# Altium PCB Arduino-Pro-Mini.PcbDoc
Units mm, origin at the board's own origin, x right, y up, seen from the top; angles counter-clockwise.
Board outline 17.78 x 33.02 mm, 2 copper layers (Top, Bottom), stack 1.57 mm thick; 29 components, 33 nets, 108 pads, 29 vias.
Unrouted connection lines stored in the file: 5.
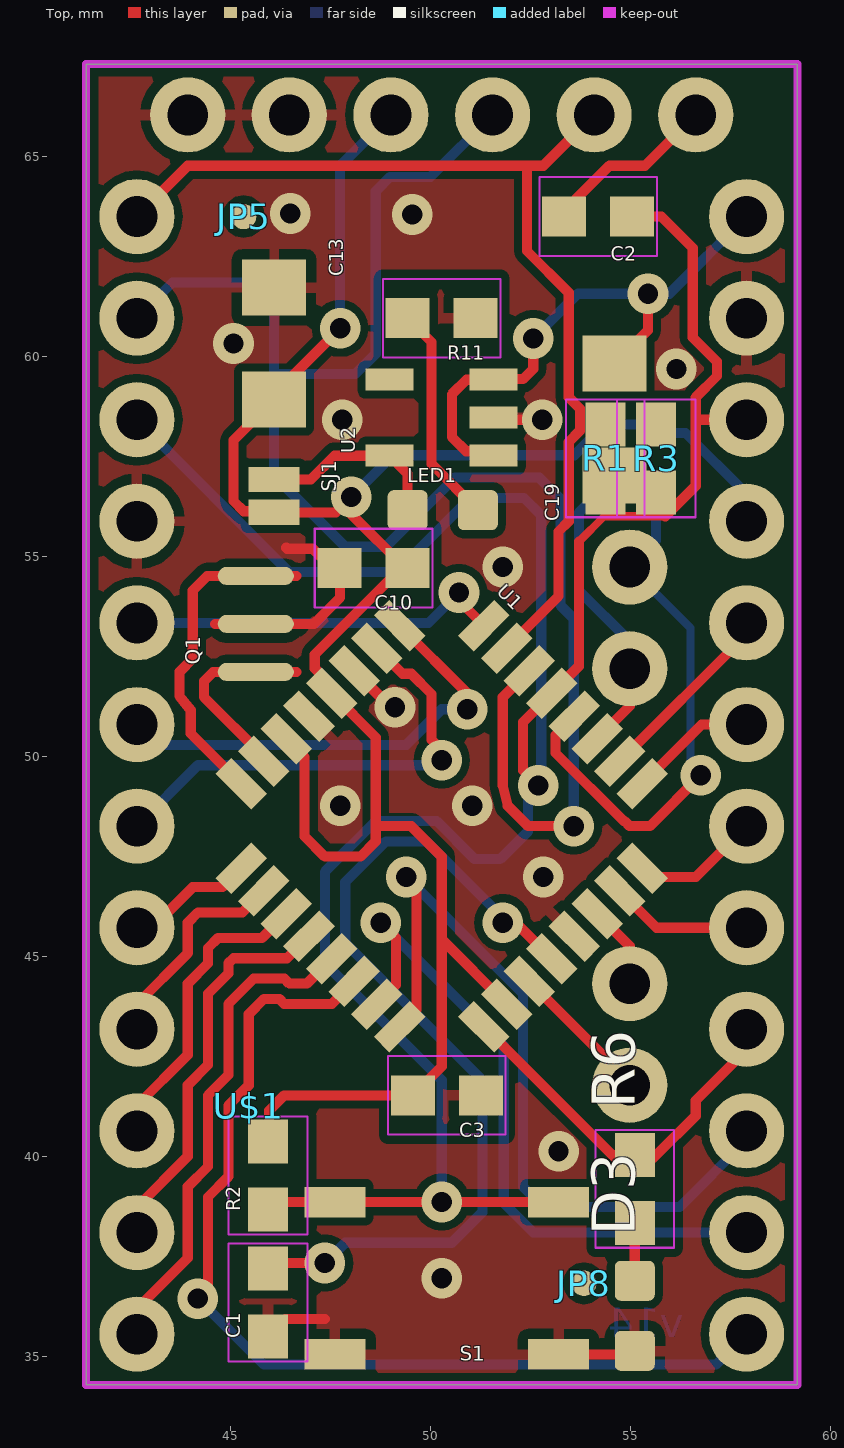
[diagram p0: Top view]
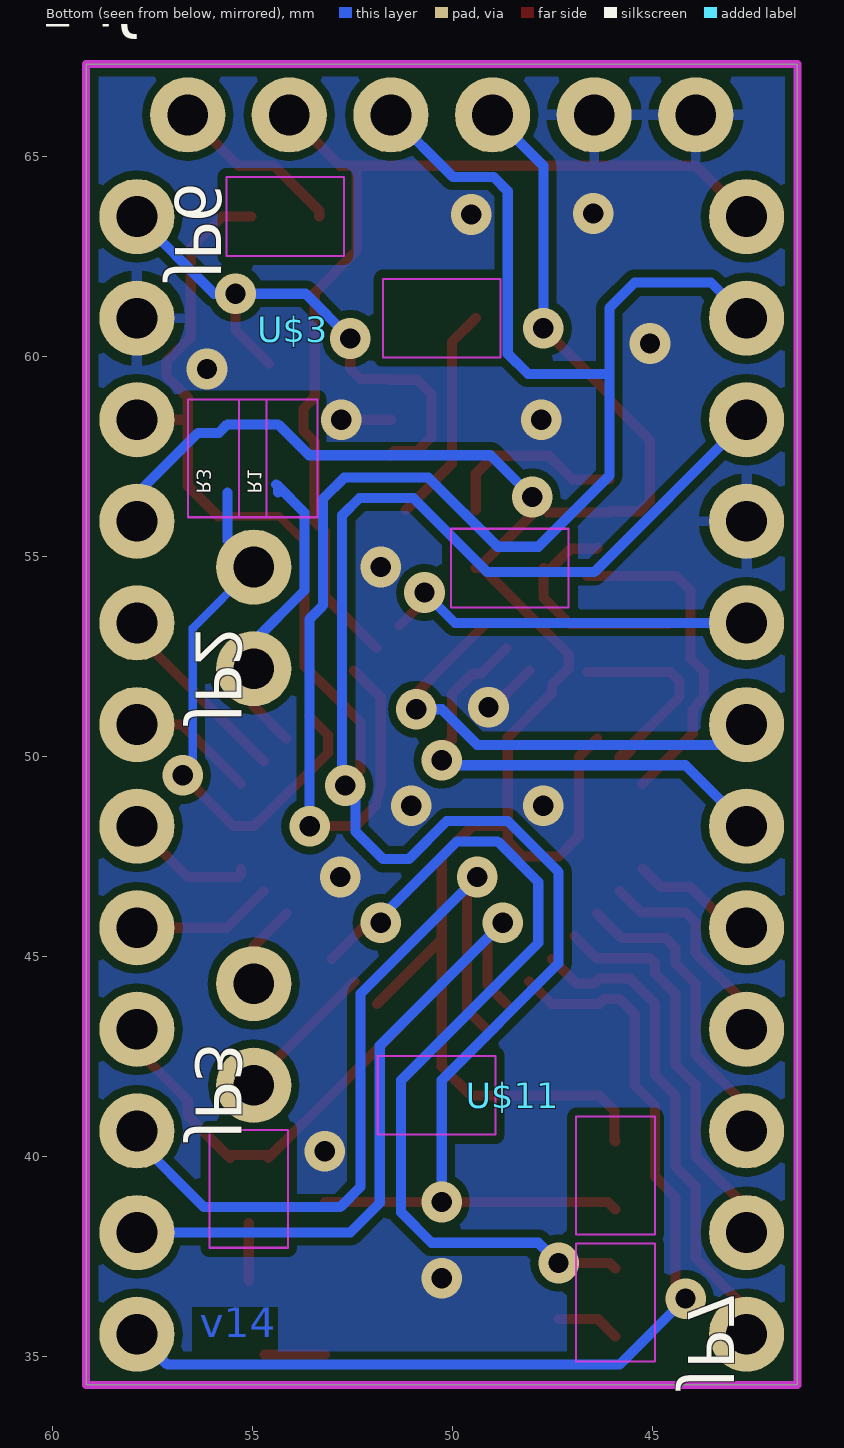
[diagram p1: Bottom view, seen from below]

## Layer stack, top to bottom
Top Solder: solder mask 0.0102, Solder Resist, Dk 3.5
Top: signal copper 0.035
Dielectric 1: core 1.5, FR-4, Dk 4.8
Bottom: signal copper 0.035
Bottom Solder: solder mask 0.0102, Solder Resist, Dk 3.5

## Board outline
41.382,67.31 41.382,34.29 59.162,34.29 59.162,67.31

## Design rules (kind name [scope] priority, off if disabled: settings)
Clearance [All] p1: gap=0.203 ignorepadtopadclearanceinfootprint=FALSE except(0: SMDPad-SMDPad SMDPad-THPad SMDPad-Via)
Clearance "Clearance (Same Net)" [All] p2: gap=0 ignorepadtopadclearanceinfootprint=FALSE except(0.203: SMDPad-SMDPad SMDPad-THPad SMDPad-Via)
HoleSize HoleSize_1 [All] p1: absolutevalues=TRUE maxlimit=2540 minlimit=0.381 maxpercent=80.000 minpercent=20.000
HoleSize [All] p2: absolutevalues=TRUE maxlimit=2.54 minlimit=0.025 maxpercent=80.000 minpercent=20.000
HoleToHoleClearance mdViaViaSameLayer [All] p1: gap=0.203 allowstackedmicrovias=TRUE
HoleToHoleClearance [All] p2: gap=0.254 allowstackedmicrovias=TRUE
PasteMaskExpansion mlMinCreamFrame [All] p1: expansion=0
PasteMaskExpansion [All] p2: expansion=0
PolygonConnect ThermalVias [IsVia] p1: connectstyle=Direct reliefconductorwidth=0.254 reliefentries=4 polygonreliefangle="90 Angle" airgapwidth=0.254
PolygonConnect [All] p2: connectstyle=Relief reliefconductorwidth=0.254 reliefentries=4 polygonreliefangle="90 Angle" airgapwidth=0.254
RoutingVias [All] p1: holewidth=0.711 width=1.27 viastyle="Through Hole" minholewidth=0.711 minwidth=1.27 maxholewidth=0.711 maxwidth=1.27
SilkToSilkClearance [All] p1 off: silktosilkclearance=0.254
SilkToSolderMaskClearance [IsPad] p1 off: minsilkscreentomaskgap=0.254 clearancetoexposedcopper=TRUE
SolderMaskExpansion mlMinStopFrame [All] p1: expansion=0.102
SolderMaskExpansion [All] p2: expansion=0.102
Width Width_1 [All] p1: maxlimit=2540 minlimit=0.178 preferedwidth=0.254
Width [All] p2: maxlimit=0.254 minlimit=0.254 preferedwidth=0.254
25 further rules are at their usual default settings.

## Components (designator, comment, footprint, x,y, rotation, side; value= is the part's Value field where it differs from the comment)
C1 "0.1uF" 0603-CAP 45.929,36.347 r90 top
C2 "0.1uF" 0603-CAP 54.184,63.5 r180 top
C3 "0.1uF" 0603-CAP 50.399,41.529 r180 top
C10 "0.1uF" 0603-CAP 48.57,54.712 r180 top
C13 "10uF" EIA3216 46.081,60.325 r270 top
C19 "10uF" EIA3216 54.59,58.42 r90 top
D3 "Green" 0603-LED-ALT1 55.098,36.017 r180 top
FRAME1 "" CREATIVE_COMMONS 25.4,25.4 r0 top
JP1 "FTDI Basic" 1X06 56.622,66.04 r180 bottom
JP2 "" 1X02 54.971,52.197 r90 bottom
JP3 "" 1X02 54.971,41.783 r90 bottom
JP5 "" MICRO-FIDUCIAL 45.319,63.5 r0 top
JP6 "" 1X12 57.892,63.5 r270 bottom
JP7 "" 1X12 42.652,35.56 r90 bottom
JP8 "" MICRO-FIDUCIAL 53.828,36.83 r0 top
LED1 "Red" 0603-LED-ALT1 50.298,56.159 r270 top
Q1 "8/16/20MHz" RESONATOR-SMD-1:1 45.624,53.315 r90 top
R1 "" 0603-RES#1 54.362,57.455 r90 bottom
R2 "10K" 0603-RES#2 45.929,39.522 r90 top
R3 "" 0603-RES#1 55.632,57.455 r90 bottom
R6 "330" 0603-RES#2 55.098,39.192 r270 top
R11 "10K" 0603-RES#2 50.272,60.96 r180 top
S1 "Reset" TACTILE-SWITCH-SMD-ALT01 50.399,36.957 r180 top
SJ1 "" SJ_2S 46.081,56.515 r270 top
U1 "ATMEGA328" TQFP32-08 50.272,48.26 r315 top
U2 "MIC5205" SOT23-5 50.272,58.471 r90 top
U$1 "" SFE-LOGO-FLAME 45.446,41.275 r0 top
U$3 "" OSHW-LOGO-S 53.981,60.681 r90 bottom
U$11 "" SFE-NEW-WEBLOGO 48.494,41.529 r90 bottom

## Footprints (in the part's own frame and the unit in brackets; to place one, negate y for a bottom-side part, rotate by r counter-clockwise, add the part's x,y. Pads: shape width x height; smd on the part's side, far side on the other; paste and mask are expansions set on the pad)
1X02 [mil] "1X02"
  round 74 hole 40: 1(0,0) 2(100,0)
1X06 [mil] "1X06"
  round 74 hole 40: 1(0,0) 2(100,0) 3(200,0) 4(300,0) 5(400,0) 6(500,0)
1X12 [mil] "1X12"
  round 74 hole 40: 1(0,0) 2(100,0) 3(200,0) 4(300,0) 5(400,0) 6(500,0) 7(600,0) 8(700,0) 9(800,0) 10(900,0) 11(1000,0) 12(1100,0)
0603-CAP [mm] "0603-CAP"
  rect 1.1x1 smd: 1(-0.85,0) 2(0.85,0)
  Keep-Out Layer lines w0.051: -1.473,0.983 -1.473,-0.983 1.473,-0.983 1.473,0.983 -1.473,0.983
0603-LED-ALT1 [mm] "0603-LED-ALT1"
  rrect30% 1x1 smd: A(0,-0.877) C(0,0.877)
0603-RES#1 [mm] "0603-RES"
  rect 1.1x1 smd far side: 1(-0.85,0) 2(0.85,0)
  Keep-Out Layer lines w0.051: -1.473,-0.983 -1.473,0.983 1.473,0.983 1.473,-0.983 -1.473,-0.983
0603-RES#2 [mm] "0603-RES"
  rect 1.1x1 smd: 1(-0.85,0) 2(0.85,0)
  Keep-Out Layer lines w0.051: -1.473,0.983 -1.473,-0.983 1.473,-0.983 1.473,0.983 -1.473,0.983
CREATIVE_COMMONS [mm] "CREATIVE_COMMONS"
EIA3216 [mm] "EIA3216"
  rect 1.4x1.6 smd: A(1.4,0) C(-1.4,0)
MICRO-FIDUCIAL [mm] "MICRO-FIDUCIAL"
  rrect100% 0.635x0.635 smd paste-0.318: 1(0,0)
OSHW-LOGO-S [mm] "OSHW-LOGO-S"
RESONATOR-SMD-1:1 [mm] "RESONATOR-SMD-1:1"
  rrect100% 0.45x1.905 smd: 1(-1.2,0) 2(0,0) 3(1.2,0)
  Top lines w0.254: -1.2,1.016 -1.2,0 -1.2,-1.016 ; 0,1.016 0,0 0,-1.016 ; 1.2,1.016 1.2,0 1.2,-1.016
SFE-LOGO-FLAME [mm] "SFE-LOGO-FLAME"
SFE-NEW-WEBLOGO [mm] "SFE-NEW-WEBLOGO"
SJ_2S [mm] "SJ_2S"
  rect 0.635x1.27 smd: 1(-0.412,0) 2(0.412,0)
SOT23-5 [mm] "SOT23-5"
  rect 0.55x1.2 smd: 1(-0.95,-1.3) 2(0,-1.3) 3(0.95,-1.3) 4(0.95,1.3) 5(-0.95,1.3)
TACTILE-SWITCH-SMD-ALT01 [mil] "TACTILE-SWITCH-SMD-ALT01"
  rect 60x30 smd: 1(-110,75) 2(110,75) 3(-110,-75) 4(110,-75)
TQFP32-08 [mil] "TQFP32-08"
  rect 50x22 smd: 1(-169,110.24) 2(-169,78.74) 3(-169,47.24) 4(-169,15.75) 5(-169,-15.75) 6(-169,-47.24) 7(-169,-78.74) 8(-169,-110.24) 17(169,-110.24) 18(169,-78.74) 19(169,-47.24) 20(169,-15.75) 21(169,15.75) 22(169,47.24) 23(169,78.74) 24(169,110.24)
  rect 22x50 smd: 9(-110.24,-169) 10(-78.74,-169) 11(-47.24,-169) 12(-15.75,-169) 13(15.75,-169) 14(47.24,-169) 15(78.74,-169) 16(110.24,-169) 25(110.24,169) 26(78.74,169) 27(47.24,169) 28(15.75,169) 29(-15.75,169) 30(-47.24,169) 31(-78.74,169) 32(-110.24,169)

## Part data
C1 C2 C3 C10: library part 0603-CAP
C13 C19: library part EIA3216
D3 LED1: library part 0603-LED-ALT1
FRAME1: library part CREATIVE_COMMONS
JP1: library part 1X06
JP2 JP3: library part 1X02
JP5 JP8: library part MICRO-FIDUCIAL
JP6 JP7: library part 1X12
Q1: library part RESONATOR-SMD-1:1
R1 R2 R3 R6 R11: library part 0603-RES
S1: library part TACTILE-SWITCH-SMD-ALT01
SJ1: library part SJ_2S
U1: library part TQFP32-08
U2: library part SOT23-5
U$1: library part SFE-LOGO-FLAME
U$3: library part OSHW-LOGO-S
U$11: library part SFE-NEW-WEBLOGO

## Via types
v1: diameter 1.016/1.016 (per signal layer), hole 0.508, Top to Bottom, 29 vias

## Nets (pads, with @x,y where several pads share a name; then routed paths per layer and width w, separated by ;. In a path a pad name is that pad's centre, name@x,y a point inside that pad or via, vN(x,y) a via of type N, cw(c..) or ccw(c..) an arc to the next point about the centre after c; other vN are vias at no path point)
A0: JP6.8 U1.23 | length 3.6
  Top w0.254: U1.23 55.64,45.72 JP6.8
A1: JP6.7 U1.24 | length 3.3
  Top w0.254: U1.24@55.287,47.205 55.287,47.055 55.352,46.99 56.622,46.99 JP6.7
A2: JP6.6 U1.25 | length 3.2
  Top w0.254: U1.25@55.287,49.315 56.772,50.8 JP6.6
A3: JP6.5 U1.26 | length 5.1
  Top w0.254: U1.26 JP6.5@57.892,53.051 ; JP6.5@57.892,53.051 JP6.5 JP6.5@57.892,53.052
A4: JP2.1 R1.1 U1.27 | length 7.7
  Top w0.254: U1.27 54.971,51.262 JP2.1
  Bottom w0.254: 54.362,56.605 54.362,56.754 ; 54.412,56.805 54.362,56.754 ; JP2.1 54.971,52.883 53.701,54.153 53.701,56.094 54.362,56.754
A5: JP2.2 R3.1 U1.28 | length 14.1
  Top w0.254: U1.28 53.117,50.539 53.117,50.089 54.819,48.387 54.844,48.387 54.971,48.26 55.479,48.26 v1(56.749,49.53)
  Bottom w0.203: JP2.2 56.495,53.213 56.495,49.784 v1(56.749,49.53)
  Bottom w0.254: JP2.2 55.632,55.397 55.632,56.605
A6: JP3.1 U1.19 | length 3.6
  Top w0.254: U1.19 54.971,41.864 JP3.1
A7: JP3.2 U1.22 | length 2.1
  Top w0.254: U1.22 54.971,45.258 JP3.2
AREF: C1.2 U1.20 | length 22.8
  Top w0.254: C1.2 46.07,37.338 v1(47.351,37.338) ; U1.20 v1@52.12,45.847 ; v1@52.12,45.847 v1(51.796,45.847) v1@52.119,45.847
  Bottom w0.254: v1(47.351,37.338) 47.859,37.846 50.526,37.846 51.288,38.608 51.288,41.91 47.859,45.339 47.859,46.863 48.875,47.879 49.891,47.879 51.796,45.974 v1(51.796,45.847)
D2: JP7.8 U1.32 | length 9.5
  Top w0.254: v1(50.704,54.102) 50.704,53.899 U1.32@51.328,53.275
  Bottom w0.254: JP7.8 49.942,53.34 v1(50.704,54.102)
D3: JP7.7 U1.1 | length 12
  Top w0.254: U1.1@49.217,53.275 v1@50.907,51.585 ; v1@50.907,51.585 v1(50.907,51.181) v1@50.907,51.585
  Bottom w0.254: JP7.7 43.16,50.292 49.383,50.292 50.272,51.181 v1(50.907,51.181)
D4: JP7.6 U1.2 | length 12.3
  Top w0.254: U1.2 49.29,52.07 49.51,52.07 50.018,51.562 50.018,50.419 50.526,49.911 v1(50.272,49.911)
  Bottom w0.254: JP7.6 44.176,49.784 50.145,49.784 v1(50.272,49.911)
D5: JP7.5 U1.9 | length 3.2
  Top w0.254: JP7.5 43.033,45.72 44.049,46.736 44.788,46.736 U1.9@45.257,47.205
D6: JP7.4 U1.10 | length 5.7
  Top w0.254: JP7.4@42.652,43.468 JP7.4 42.652,43.815 43.922,45.085 43.922,45.847 44.176,46.101 45.285,46.101 U1.10
D7: JP7.3 U1.11 | length 7.6
  Top w0.254: JP7.3 42.652,41.275 43.922,42.545 43.922,44.323 44.43,44.831 44.43,45.212 44.684,45.466 45.781,45.466 U1.11
D8: JP7.2 U1.12 | length 10
  Top w0.254: JP7.2 42.652,38.735 43.922,40.005 43.922,41.783 44.43,42.291 44.43,44.069 44.938,44.577 44.938,44.831 45.065,44.958 46.405,44.958 U1.12
D9: JP7.1 U1.13 | length 12.4
  Top w0.254: JP7.1 42.652,36.195 43.922,37.465 43.922,39.243 44.43,39.751 44.43,41.529 44.938,42.037 44.938,43.815 45.573,44.45 46.335,44.45 46.462,44.323 46.901,44.323 U1.13@47.52,44.942
D10: JP6.12 U1.14 | length 25.4
  Top w0.254: v1(44.176,36.449) 44.43,36.703 44.43,38.989 44.938,39.497 44.938,41.275 45.446,41.783 45.446,43.561 45.827,43.942 46.208,43.942 46.335,43.815 47.524,43.815 U1.14
  Bottom w0.254: v1(44.176,36.449) 45.827,34.798 57.13,34.798 JP6.12
DTR: C2.2 JP1.1 | length 4.4
  Top w0.254: C2.2 53.334,63.641 54.463,64.77 55.352,64.77 JP1.1
GND: C1.1 C3.1 C10.2 C13.C C19.C D3.C JP1.5 JP1.6 JP6.2 JP7.9 Q1.2 R11.1 S1.1 S1.2 U1.3 U1.5 U1.21 U2.2 | length 9.4
  Top w0.254: C1.1 46.372,35.941 47.351,35.941 ; 46.386,55.22 46.411,55.194 47.046,55.194 47.732,54.508 47.732,53.975 47.072,53.315 46.64,53.315 ; C10.2 C10.2@47.732,54.7 ; U1.3 49.048,51.181 v1@49.129,51.181 ; U2.2@51.542,58.42 v1(52.787,58.42) ; S1.1 D3.C@54.705,35.052
  other v1: 50.272,36.957 53.193,40.132 52.812,46.99 47.732,48.768 51.034,48.768 49.104,51.232 51.796,54.737 47.783,58.42 56.14,59.69 45.065,60.325 49.536,63.551 46.488,63.576
MISO: JP6.10 U1.16 | length 19.7
  Top w0.254: U1.16@49.217,43.245 49.637,43.665 49.637,46.736 v1(49.383,46.99)
  Bottom w0.254: v1(49.383,46.99) 52.304,44.069 52.304,39.243 52.812,38.735 56.216,38.735 57.892,40.411 JP6.10
MOSI: JP6.11 U1.15 | length 17.1
  Top w0.254: U1.15 49.129,44.289 49.129,45.466 v1(48.748,45.847)
  Bottom w0.254: v1(48.748,45.847) 51.822,42.774 51.822,38.837 52.558,38.1 JP6.11
N$1: Q1.3 U1.8 | length 6.3
  Top w0.254: 44.608,54.514 44.411,54.514 44.049,54.153 44.049,52.451 43.719,52.121 43.719,51.511 43.998,51.156 43.998,50.574 U1.8@45.257,49.315
N$2: Q1.1 U1.7 | length 3.4
  Top w0.254: 44.608,52.115 44.557,52.115 44.329,51.886 44.329,51.486 45.823,49.992 U1.7 ; U1.7@45.544,50.16 U1.7@45.823,49.882
N$3: LED1.A SJ1.1 U2.5 | length 4.7
  Top w0.254: SJ1.1 47.001,56.927 47.595,57.521 U2.5 49.421,57.072 LED1.A
N$4: LED1.C R11.2 | length 5.5
  Top w0.254: R11.2 50.018,60.364 50.018,57.316 LED1.C
N$7: D3.A R6.2 | length 1.4
  Top w0.254: D3.A R6.2
RAW: C19.A JP6.1 U2.1 U2.3 | length 14.1
  Top w0.254: U2.1 51.46,57.633 50.882,57.633 50.526,57.988 50.526,59.055 50.892,59.421 U2.3 51.587,59.436 52.304,59.436 52.558,59.69 v1(52.558,60.452) ; C19.A 55.428,60.658 v1(55.428,61.57)
  Bottom w0.254: v1(52.558,60.452) 53.676,61.57 v1(55.428,61.57) 55.962,61.57 JP6.1
RESET: C2.1 JP6.3 JP7.10 R2.1 S1.3 S1.4 U1.29 | length 63.6
  Top w0.203: 53.701,55.372 54.336,56.007 55.86,56.007
  Top w0.254: R2.1 46.118,38.862 S1.4 v1(50.272,38.862) S1.3 ; v1(52.685,49.276) 52.304,49.657 52.304,50.858 U1.29 53.701,52.255 53.701,55.372 ; C2.1 55.759,63.5 56.546,62.713 56.546,60.477 57.156,59.868 57.156,59.512 56.622,58.979 56.622,58.42 ; 55.86,56.007 56.622,56.769 56.622,58.42 ; JP6.3 56.622,58.42
  Bottom w0.254: JP7.10 46.462,54.61 49.129,54.61 50.983,56.464 52.33,56.464 52.761,56.032 52.761,49.352 v1(52.685,49.276) 52.431,49.022 52.431,48.133 51.733,47.434 51.098,47.434 50.145,48.387 48.621,48.387 47.351,47.117 47.351,44.831 50.272,41.91 v1(50.272,38.862)
RXI: JP1.3 JP7.11 U1.30 | length 41.5
  Top w0.254: U1.30 51.796,51.481 51.796,49.276 51.923,48.768 52.431,48.26 v1(53.574,48.26)
  Bottom w0.254: JP7.11 43.541,61.849 45.446,61.849 46.081,61.214 46.081,59.563 ; JP1.3 49.993,64.491 48.977,64.491 48.621,64.135 48.621,60.071 48.113,59.563 46.081,59.563 ; v1(53.574,48.26) 53.574,53.442 53.244,53.772 53.244,56.439 52.711,56.972 50.602,56.972 48.875,55.245 47.859,55.245 46.081,57.023 46.081,59.563
SCK: JP6.9 R6.1 U1.17 | length 9.9
  Top w0.254: U1.17@51.328,43.245 54.007,40.565 54.53,40.042 ; R6.1@54.606,39.966 54.53,40.042 ; R6.1@55.567,39.966 55.643,40.042 ; JP6.9 57.892,42.672 56.622,41.402 56.622,41.021 55.643,40.042 ; 54.53,40.042 R6.1 55.643,40.042
TXO: JP1.2 JP7.12 U1.31 | length 25.8
  Top w0.254: JP7.12 43.922,64.77 52.406,64.77 ; U1.31 53.193,54.009 53.193,55.626 53.447,55.88 53.447,57.861 53.727,58.141 53.727,58.699 53.447,58.979 53.447,61.595 52.406,62.636 52.406,64.77 ; JP1.2 52.812,64.77 52.431,64.77 52.406,64.77
VCC: C3.2 C10.1 C13.A JP1.4 JP6.4 R1.2 R2.2 R3.2 SJ1.2 U1.4 U1.6 U1.18 | length 57.5
  Top w0.254: R2.2 45.954,40.398 45.954,41.148 46.335,41.529 C3.2 50.272,42.252 50.272,45.339 ; U1.6 46.843,49.992 46.843,48.006 47.351,47.498 48.24,47.498 48.621,47.879 48.621,48.26 ; U1.4@47.52,51.603 U1.4@47.52,51.578 ; v1(47.732,60.706) 46.081,59.055 C13.A 45.065,57.909 45.065,56.388 45.319,56.134 46.05,56.134 SJ1.2 47.625,56.103 v1(48.012,56.49) 48.012,56.058 49.358,54.712 C10.1 49.256,54.712 47.097,52.553 47.097,52.204 47.52,51.781 U1.4@47.52,51.578 ; U1.18 50.272,45.431 ; U1.4@47.52,51.578 48.621,50.477 48.621,48.26 ; 48.621,48.26 49.51,48.26 50.272,47.498 50.272,45.431 ; 50.272,45.339 50.272,45.431 ; 50.272,45.339 50.318,45.385 50.272,45.431
  Bottom w0.254: v1(47.732,60.706) 47.732,64.77 JP1.4 ; v1(48.012,56.49) 49.053,57.531 53.588,57.531 54.362,58.305 55.632,58.305 55.846,58.09 56.368,58.09 57.892,56.566 JP6.4
pads on no net: JP5.1 JP8.1 U2.4

## Polygon pours and split planes (outlines as drawn)
GND on Top "Top-GND" (solid, remove dead copper, pour order 0): 41.255,67.437 59.289,67.437 59.289,34.163 41.255,34.163
GND on Bottom "Bottom-GND" (solid, remove dead copper, pour order 2): 41.255,67.437 59.289,67.437 59.289,34.163 41.255,34.163

## Keep-outs
Keep-Out Layer:
  the board outline again, w0.203

## Other copper
Bottom:
  text "v14" at 56.317,35.23 h1.26

## Silkscreen, mask and mechanical layers (free items; w line width, h text height)
Dimension:
  the board outline again, w0.203
Top Assembly:
  circle w0.254: c57.892,38.1 r1.016
  circle w0.254: c57.892,35.56 r1.016
  circle w0.254: c42.652,35.56 r1.016
  circle w0.254: c42.652,50.8 r1.016
  circle w0.254: c42.652,45.72 r1.016
  circle w0.254: c42.652,43.18 r1.016
  text "BLK" at 42.652,65.024 h1.26 r90
  text "GRN" at 58.654,65.024 h1.26 r90
  text "GND" at 45.446,64.135 h1.26
  text "VCC" at 47.986,64.135 h1.26
  text "RXI" at 50.653,64.135 h1.26
  text "TXO" at 53.066,64.135 h1.26
  text "Mini" at 50.018,62.865 h1.26
  text "TXO" at 44.684,62.484 h1.26 r90
  text "RAW" at 56.749,62.484 h1.26 r90
  text "Arduino Pro" at 47.935,61.747 h1.26
  text "RXI" at 44.684,59.944 h1.26 r90
  text "GND" at 56.749,59.944 h1.26 r90
  text "RST" at 44.684,57.404 h1.26 r90
  text "RST" at 56.749,57.404 h1.26 r90
  text "VCC" at 56.749,54.864 h1.26 r90
  text "GND" at 44.684,54.737 h1.26 r90
  text "2" at 44.532,53.086 h1.26 r90
  text "A3" at 56.749,52.705 h1.26 r90
  text "3" at 44.862,50.419 h1.57 r90
  text "A2" at 56.749,50.165 h1.26 r90
  text "4" at 44.811,47.879 h1.57 r90
  text "A1" at 56.749,47.498 h1.57 r90
  text "5" at 44.811,45.339 h1.57 r90
  text "A0" at 56.749,44.958 h1.57 r90
  text "6" at 44.811,42.799 h1.57 r90
  text "13" at 56.749,42.418 h1.57 r90
  text "7" at 44.811,40.386 h1.57 r90
  text "12" at 56.749,39.878 h1.57 r90
  text "Reset" at 48.723,39.853 h0.81
  text "8" at 44.811,37.719 h1.57 r90
  text "11" at 56.749,37.338 h1.57 r90
  text "9" at 44.811,35.179 h1.57 r90
  text "10" at 56.749,34.798 h1.57 r90
Bottom Assembly:
  rectangle: 46.716,34.925 47.351,35.56
  rectangle: 47.986,34.925 48.621,35.56
  rectangle: 49.256,34.925 49.891,35.56
  rectangle: 50.526,34.925 51.161,35.56
  rectangle: 53.066,34.925 53.701,35.56
  rectangle: 51.796,34.925 52.431,35.56
  text "A5" at 52.558,53.975 h1.26 r270
  text "A4" at 52.558,51.562 h1.26 r270
  text "A7" at 52.558,43.51 h1.26 r270
  text "www.arduino.cc" at 45.573,41.148 h2.76 r270
  text "A6" at 52.558,40.97 h1.26 r270
  text "8MHz" at 46.589,35.814 h1.26 r270
  text "10MHz" at 47.859,35.814 h1.26 r270
  text "16MHz" at 49.129,35.814 h1.26 r270
  text "20MHz" at 50.399,35.814 h1.26 r270
  text "3.3V" at 51.669,35.814 h1.26 r270
  text "5V" at 52.939,35.814 h1.26 r270
Assembly Text Top:
  text "Valid combinations:" at 61.194,60.452 h1.97
  text "168V / 3.3V Reg / 8MHz" at 61.194,57.912 h1.97
  text "168 / 5V Reg / 16MHz" at 61.194,55.372 h1.97
  text "168 / 5V Reg / 20MHz" at 61.194,52.832 h1.97
  text "Mark back accordingly" at 61.194,50.292 h1.97
  text "Arduino Pro Mini" at 34.27,31.369 h3.54
Assembly Top:
  lines w0.076: 44.811,34.798 44.811,63.5 ; 56.876,34.798 56.876,63.5
  text "Original Arduino Mini Design by Team Arduino" at 56.622,27.406 h1.51
  text "Arduino Pro Mini Design by SparkFun Electronics" at 56.622,25.895 h1.51
  text "Revised by Pete Lewis" at 56.622,24.384 h1.51

## Text inside footprints (layer, text, board x,y; h text height)
FRAME1: Assembly Top "Designed by:" at 36.83,25.4 h2.76; Assembly Top "http://creativecommons.org/licenses/by-sa/3.0" at 25.4,27.94 h2.76; Assembly Top "Released under the Creative Commons Attribution Share-Alike 3.0 License" at 5.08,30.48 h2.76